# EAGLE board QuackDriveBS (EAGLE 9.5.1)
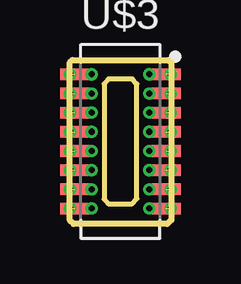
[diagram p0: board, top side]
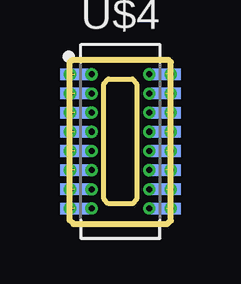
[diagram p1: board, bottom side, seen from below]

Size 4.22 x 6.85 mm. Coordinates in mm from the lower left corner, seen from the top.
Outline: 4.22,6.73 4.22,0.17 4.05,0 0.15,0 0,0.15 0,6.75 0.1,6.85 4.1,6.85 4.22,6.73
Outline: 1.6,0.85 2.6,0.85 2.79,1.05 2.79,5.85 2.6,6.05 1.6,6.05 1.43,5.84 1.43,1.04 1.6,0.85
Copper layers (1*16): Top 0.07mm / dielectric 0.8mm / Bottom 0.07mm
Design rules "default *": minimum track width 6mil, minimum drill 10mil, track to track 6mil, track to pad 6mil, pad to pad 6mil, via to via 6mil, smd to smd 0mil, copper to edge 6mil, drill to drill 6mil, minimum pad ring 5mil, minimum via ring 5mil, stop-mask expansion 4mil, vias tented up to drill 50mil, thermal gap 10mil
Net classes: 0 Default: width 0.203 mm

## Footprints (pad centres in the part's own frame; a part is rotated, then mirrored left to right if it is on the bottom)
SOP80P420X355-16N = smd 1.212 x 0.484: 1 1.91,2.8; 2 1.91,2; 3 1.91,1.2; 4 1.91,0.4; 5 1.91,-0.4; 6 1.91,-1.2; 7 1.91,-2; 8 1.91,-2.8; 9 -1.91,-2.8; 10 -1.91,-2; 11 -1.91,-1.2; 12 -1.91,-0.4; 13 -1.91,0.4; 14 -1.91,1.2; 15 -1.91,2; 16 -1.91,2.8
SOP80P420X355-16N' = smd 1.212 x 0.484: 1 -1.9,2.8; 2 -1.9,2; 3 -1.9,1.2; 4 -1.9,0.4; 5 -1.9,-0.4; 6 -1.9,-1.2; 7 -1.9,-2; 8 -1.9,-2.8; 9 1.9,-2.8; 10 1.9,-2; 11 1.9,-1.2; 12 1.9,-0.4; 13 1.9,0.4; 14 1.9,1.2; 15 1.9,2; 16 1.9,2.8

## Placement (x,y rotation side)
U$3  WM8952DKR  [SOP80P420X355-16N]  2.1,3.45 0 top
U$4  WM8952DKR  [SOP80P420X355-16N']  2.1,3.45 0 bottom

## Library data of the parts
U$3 = WM8952DKR other half
U$4 = WM8952DKR

## Nets
N$29: U$3.1 U$4.1
N$34: U$3.2 U$4.2
N$35: U$3.3 U$4.3
N$36: U$3.4 U$4.4
N$37: U$3.5 U$4.5
N$38: U$3.6 U$4.6
N$39: U$3.7 U$4.7
N$40: U$3.8 U$4.8
N$41: U$3.9 U$4.9
N$42: U$3.10 U$4.10
N$43: U$3.11 U$4.11
N$44: U$3.12 U$4.12
N$45: U$3.13 U$4.13
N$46: U$3.14 U$4.14
N$47: U$3.15 U$4.15
N$48: U$3.16 U$4.16

## Tracks (layer width: path | path; a pad name or v marks a point on that pad's centre or on a via)
N$29  (via drill 0.25)  (2 unrouted)
  Bottom 0.203: U$4.1 v3.3,6.25
  other vias: 4.2,6.25
N$34  (via drill 0.25)  (1 unrouted)
  Top 0.203: U$3.2 3.94,5.52 3.37,5.52 v3.3,5.45
  Bottom 0.203: v3.3,5.45 U$4.2
  other vias: 4.2,5.45
N$35  (via drill 0.25)  (1 unrouted)
  Top 0.203: v3.3,4.65 U$3.3
  Bottom 0.203: U$4.3 v3.3,4.65
  other vias: 4.2,4.65
N$36  (via drill 0.25)  (1 unrouted)
  Top 0.203: U$3.4 v3.3,3.85
  Bottom 0.203: v3.3,3.85 U$4.4
  other vias: 4.2,3.85
N$37  (via drill 0.25)  (1 unrouted)
  Top 0.203: v3.3,3.05 U$3.5
  Bottom 0.203: U$4.5 v3.3,3.05
  other vias: 4.2,3.05
N$38  (via drill 0.25)  (1 unrouted)
  Top 0.203: U$3.6 v3.3,2.25
  Bottom 0.203: v3.3,2.25 U$4.6
  other vias: 4.2,2.25
N$39  (via drill 0.25)  (1 unrouted)
  Top 0.203: v3.3,1.45 U$3.7
  Bottom 0.203: U$4.7 v3.3,1.45
  other vias: 4.2,1.45
N$40  (via drill 0.25)  (1 unrouted)
  Top 0.203: U$3.8 v3.3,0.65
  Bottom 0.203: v3.3,0.65 U$4.8
  other vias: 4.2,0.65
N$41  (via drill 0.25)  (1 unrouted)
  Top 0.203: U$3.9 v0.9,0.65
  Bottom 0.203: v0.9,0.65 U$4.9
  other vias: 0,0.65
N$42  (via drill 0.25)  (1 unrouted)
  Top 0.203: U$3.10 v0.9,1.45
  Bottom 0.203: U$4.10 v0.9,1.45
  other vias: 0,1.45
N$43  (via drill 0.25)  (1 unrouted)
  Top 0.203: v0.9,2.25 U$3.11
  Bottom 0.203: U$4.11 v0.9,2.25
  other vias: 0,2.25
N$44  (via drill 0.25)  (1 unrouted)
  Top 0.203: U$3.12 v0.9,3.05
  Bottom 0.203: U$4.12 v0.9,3.05
  other vias: 0,3.05
N$45  (via drill 0.25)  (1 unrouted)
  Top 0.203: v0.9,3.85 U$3.13
  Bottom 0.203: U$4.13 v0.9,3.85
  other vias: 0,3.85
N$46  (via drill 0.25)  (1 unrouted)
  Top 0.203: U$3.14 v0.9,4.65
  Bottom 0.203: U$4.14 v0.9,4.65
  other vias: 0,4.65
N$47  (via drill 0.25)  (1 unrouted)
  Top 0.203: v0.9,5.45 U$3.15
  Bottom 0.203: U$4.15 v0.9,5.45
  other vias: 0,5.45
N$48  (via drill 0.25)  (2 unrouted)
  Top 0.203: v0.9,6.25 U$3.16
  other vias: 0,6.25